# Altium PCB Final_LDO.PcbDoc
Units mil, origin at the board's own origin, x right, y up, seen from the top; angles counter-clockwise.
Board outline 1930 x 900 mil, 2 copper layers (Top Layer, Bottom Layer); 7 components, 3 nets, 25 pads, 4 vias.
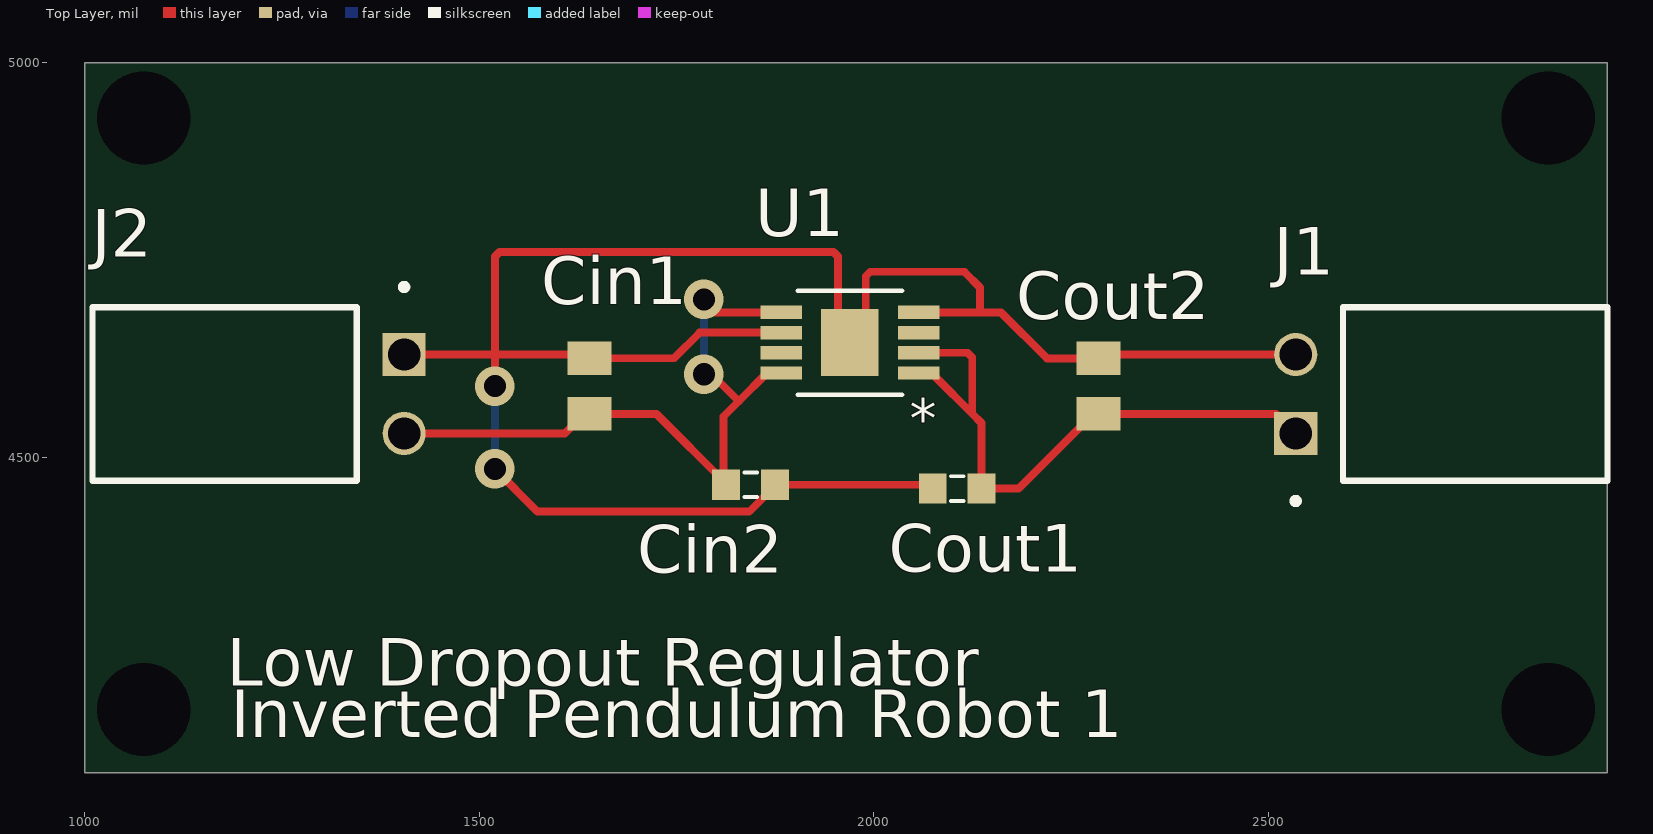
[diagram p0: Top Layer view]
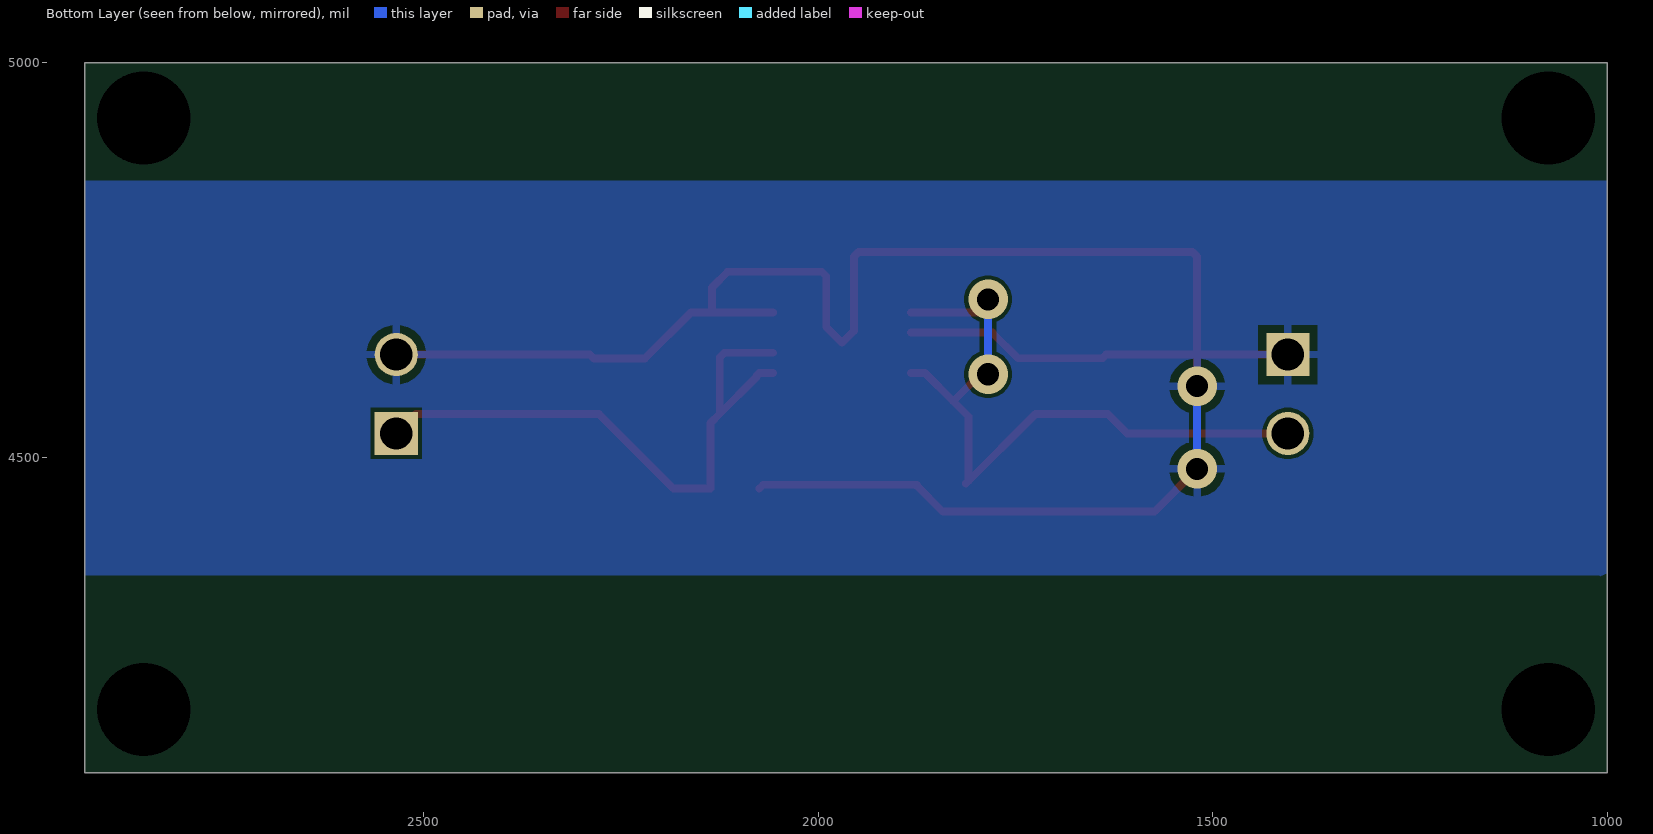
[diagram p1: Bottom Layer view, seen from below]
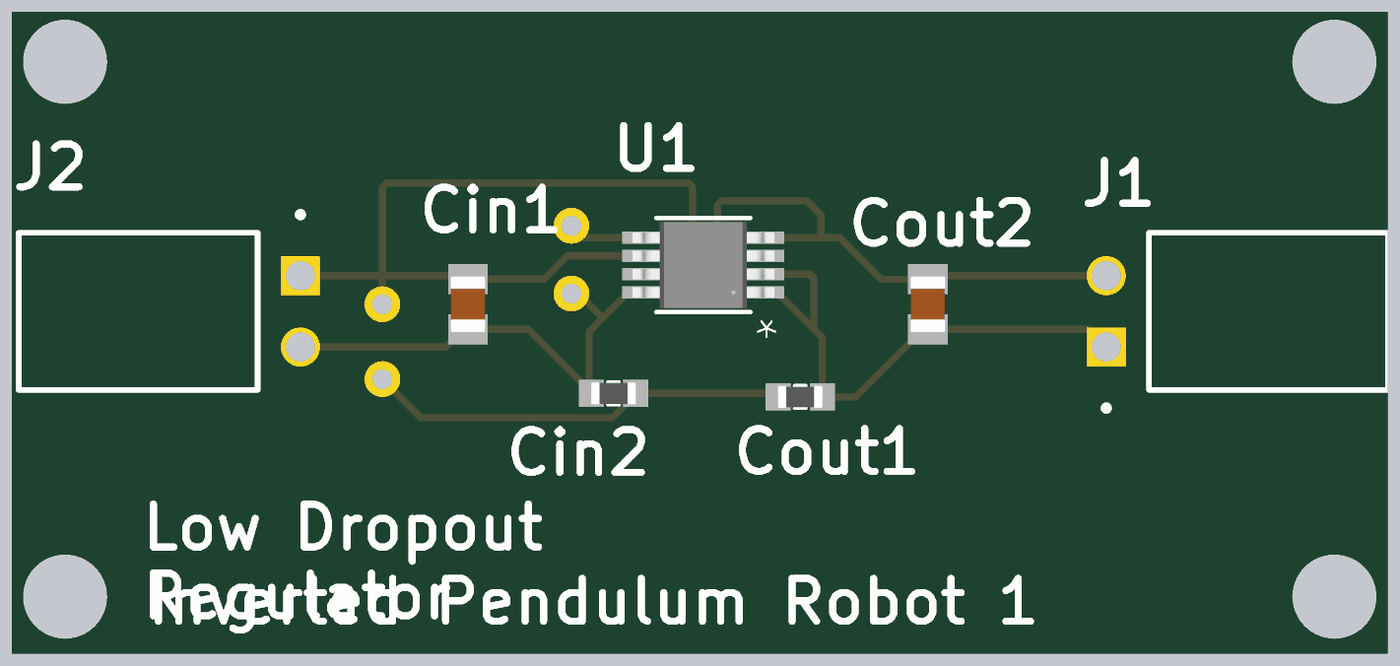
[diagram p2: 3D render of the assembled board from above, using the file's embedded part models]

## Layer stack, top to bottom
Top Solder: solder mask 0.4, Solder Resist, Dk 3.5
Top Layer: signal copper 1.4
Dielectric 1: dielectric 12.6, FR-4, Dk 4.8
Bottom Layer: signal copper 1.4
Bottom Solder: solder mask 0.4, Solder Resist, Dk 3.5

## Board outline
1000,4100 2930,4100 2930,5000 1000,5000

## Design rules (kind name [scope] priority, off if disabled: settings)
Clearance [All] p1: gap=5 ignorepadtopadclearanceinfootprint=FALSE
HoleSize [All] p1: absolutevalues=TRUE maxlimit=200 minlimit=1 maxpercent=80.000 minpercent=20.000
MinimumSolderMaskSliver [All] p1: minsoldermaskwidth=8
PolygonConnect [All] p1: connectstyle=Relief reliefconductorwidth=10 reliefentries=4 polygonreliefangle="90 Angle" airgapwidth=10
RoutingVias [All] p1: holewidth=28 width=50 viastyle="Through Hole" minholewidth=28 minwidth=50 maxholewidth=28 maxwidth=50
SilkToSilkClearance [All] p1: silktosilkclearance=5
SilkToSolderMaskClearance [IsPad] p1: minsilkscreentomaskgap=2 clearancetoexposedcopper=TRUE
SolderMaskExpansion [All] p1: expansion=0 istentingtop=FALSE
SupplyNets "Schematic Supply Nets" [InNet('GND')] p1: voltage=0.000
Width [All] p1: maxlimit=10 minlimit=10 preferedwidth=10
26 further rules are at their usual default settings.

## Classes and differential pairs
component class Final_LDO: Cin1 Cin2 Cout1 Cout2 J1 J2

## Components (designator, comment, footprint, x,y, rotation, side; value= is the part's Value field where it differs from the comment)
Cin1 "GRM21BR71A106KA73L" CAPC2012X140N 1640,4590 r270 top value="4.7 uH"
Cin2 "C1608X7R1C104KT" CAPC1608X95 1844.09,4465 r0 top value="0.1 uF"
Cout1 "C1608X7R1C104KT" CAPC1608X95 2105.91,4460 r180 top value="0.1 uF"
Cout2 "GRM21BR71A106KA73L" CAPC2012X140N 2285,4590 r270 top value="4.7 uH"
J1 "SSW-102-02-G-S-RA" SAMTEC_SSW-102-02-G-S-RA 2535,4530 r270 top
J2 "SSW-102-02-G-S-RA" SAMTEC_SSW-102-02-G-S-RA 1405,4630 r90 top
U1 "TLV76733DGNR" VSSOP8_DGN_TEX 1970,4645 r180 top

## Footprints (in the part's own frame and the unit in brackets; to place one, negate y for a bottom-side part, rotate by r counter-clockwise, add the part's x,y. Pads: shape width x height; smd on the part's side, far side on the other; paste and mask are expansions set on the pad)
CAPC1608X95 [mm]
  rect 0.9x0.97 smd: 1(-0.785,0) 2(0.785,0)
  silkscreen extent -0.2,-0.4 0.2,0.4, body extent -0.8,-0.4 0.8,0.4, height 0.95
CAPC2012X140N [mm]
  rect 1.08x1.42 smd: 1(-0.895,0) 2(0.895,0)
  body extent -1,-0.63 1,0.63, height 1.4
SAMTEC_SSW-102-02-G-S-RA [mm]
  rect 1.39x1.39 hole 1.04: 01(0,0)
  round 1.39 hole 1.04: 02(-2.54,0)
  silkscreen extent -4.07,-0.1 2.27,10.03
VSSOP8_DGN_TEX [mil]
  rect 52.5x17 smd paste+0 mask+0: 1(-87.25,38.39) 2(-87.25,12.8) 3(-87.25,-12.8) 4(-87.25,-38.39) 5(87.25,-38.39) 6(87.25,-12.8) 7(87.25,12.8) 8(87.25,38.39)
  rect 73x85 smd paste+0 mask+0: EPAD(0,0)
  silkscreen extent -66,-66 66,66, body extent -99,-61 99,61, height 43

## Part data
Cin1 Cout2: library part CMP-025-000000-1, "SMD capacitor X7R(EIA) with capacitance 10uF Tol.10%. Rated voltage 10Vdc 125C", Package="2012 Murata", Check_prices=https://www.snapeda.com/parts/GRM21BR71A106KA73L/Murata+Electronics+North+America/view-part/?ref=eda, Component Type=Standard, Design Item ID=GRM21BR71A106KA73L, MF="Murata Electronics", MP=GRM21BR71A106KA73L, Pin Count=2, SnapEDA_Link=https://www.snapeda.com/parts/GRM21BR71A106KA73L/Murata+Electronics+North+America/view-part/?ref=snap, Source=GRM21BR71A106KA73L.SchLib
Cin2 Cout1: library part CMP-031-000000-1, "0.1 ÂµF Â±10% 16V Ceramic Capacitor X7R 0603 (1608 Metric)", Package="0603 TDK", Check_prices=https://www.snapeda.com/parts/C1608X7R1C104KT/TDK/view-part/?ref=eda, Component Type=Standard, Design Item ID=C1608X7R1C104KT, MF=TDK, MP=C1608X7R1C104KT, Pin Count=2, SnapEDA_Link=https://www.snapeda.com/parts/C1608X7R1C104KT/TDK/view-part/?ref=snap, Source=C1608X7R1C104KT.SchLib
J1 J2: Package=None, Availability=Unavailable, MF=Samtec, MP=SSW-102-02-G-S-RA, Price=None
U1: "Adjustable- and fixed-output, 1-A, 16-V, positive-voltage low-dropout (LDO) linear regulator 8-HVSSOP -40 to 125", Manufacturer_Name="Texas Instruments", Copyright="Copyright (C) 2025 Ultra Librarian. All rights reserved.", Manufacturer_Part_Number=TLV76733DGNR, RefDes=RefDes, Type="Power Management"

## Free pads (board coordinates)
  round 60 hole 118.11 unplated: ""(1075,4180) ""(1075,4930) ""(2855,4180) ""(2855,4930)

## Via types
v1: diameter 50, hole 28, Top Layer to Bottom Layer, 4 vias

## Nets (pads, with @x,y where several pads share a name; then routed paths per layer and width w, separated by ;. In a path a pad name is that pad's centre, name@x,y a point inside that pad or via, vN(x,y) a via of type N, cw(c..) or ccw(c..) an arc to the next point about the centre after c; other vN are vias at no path point)
GND: Cin1.1 Cin2.2 Cout1.2 Cout2.1 J1.02 J2.01 U1.4 U1.6 U1.EPAD | length 2695.9
  Top Layer w10: J2.01 1520.12,4630 ; v1(1520,4485) 1574.09,4430.91 1842.28,4430.91 1875,4463.62 Cin2.2 2070,4465 Cout1.2 ; v1(1520,4590) 1520,4630.12 ; U1.6 1779.55,4657.8 1746.99,4625.24 Cin1.1 1635.24,4630 1520.12,4630 ; U1.4 2135,4683.39 ; J1.02 2289.76,4630 Cout2.1 2284.76,4625 2220,4625 2161.61,4683.39 2135,4683.39 ; 1520,4630.12 1520,4754.14 1525.86,4760 1949.14,4760 1955,4754.14 1955,4660 U1.EPAD 1990,4665 1990,4729.14 1995.86,4735 2115,4735 2135,4715 2135,4683.39 ; 1520,4630.12 1520.12,4630
  Bottom Layer w10: v1(1520,4485) v1(1520,4590)
NetCin1_2: Cin1.2 Cin2.1 J2.02 U1.5 U1.8 | length 901.1
  Top Layer w10: J2.02 1608.54,4530 1633.31,4554.76 Cin1.2 1724.8,4554.76 Cin2.1@1813.19,4466.38 ; v1(1785,4605) 1795,4605 1829.19,4570.81 ; v1(1785,4700) 1785,4689.24 1790.86,4683.39 U1.5 ; Cin2.1@1810,4469.57 1810,4551.61 1829.19,4570.81 ; U1.8 1865,4606.61 1829.19,4570.81
  Bottom Layer w10: v1(1785,4605) 1790,4610 1790,4620 1785,4625 v1(1785,4700)
NetCout1_1: Cout1.1 Cout2.2 J1.01 U1.1 U1.2 | length 779.2
  Top Layer w10: U1.1 2075,4606.61 2078.5,4603.11 2078.5,4601.5 2125,4555 ; U1.2 2119.14,4632.2 2125,4626.35 2125,4555 ; J1.01 2510.24,4554.76 Cout2.2 2278.31,4554.76 2183.54,4460 Cout1.1 2136.81,4543.19 2125,4555
pads on no net: U1.3 U1.7

## Polygon pours and split planes (outlines as drawn)
GND on Bottom Layer "GND Plane" (solid, pour order 1): 1000,4850 2930,4850 2930,4350 1010,4350 1000,4340 1000,4847.5

## Silkscreen, mask and mechanical layers (free items; w line width, h text height)
Top Overlay:
  text "Low Dropout Regulator" at 1180,4210 h60
  text "Inverted Pendulum Robot 1" at 1185,4145 h60

## Text inside footprints (layer, text, board x,y; h text height)
U1: Top Overlay "*" at 2079.75,4594.61 h50 r180; Mechanical 13 "*" at 2028.5,4637 h50 r180